# Altium PCB sync.PcbDoc
Units mil, origin at the board's own origin, x right, y up, seen from the top; angles counter-clockwise.
Board outline 4725 x 1750 mil, 2 copper layers (Top Layer, Bottom Layer); 51 components, 35 nets, 217 pads, 12 vias.
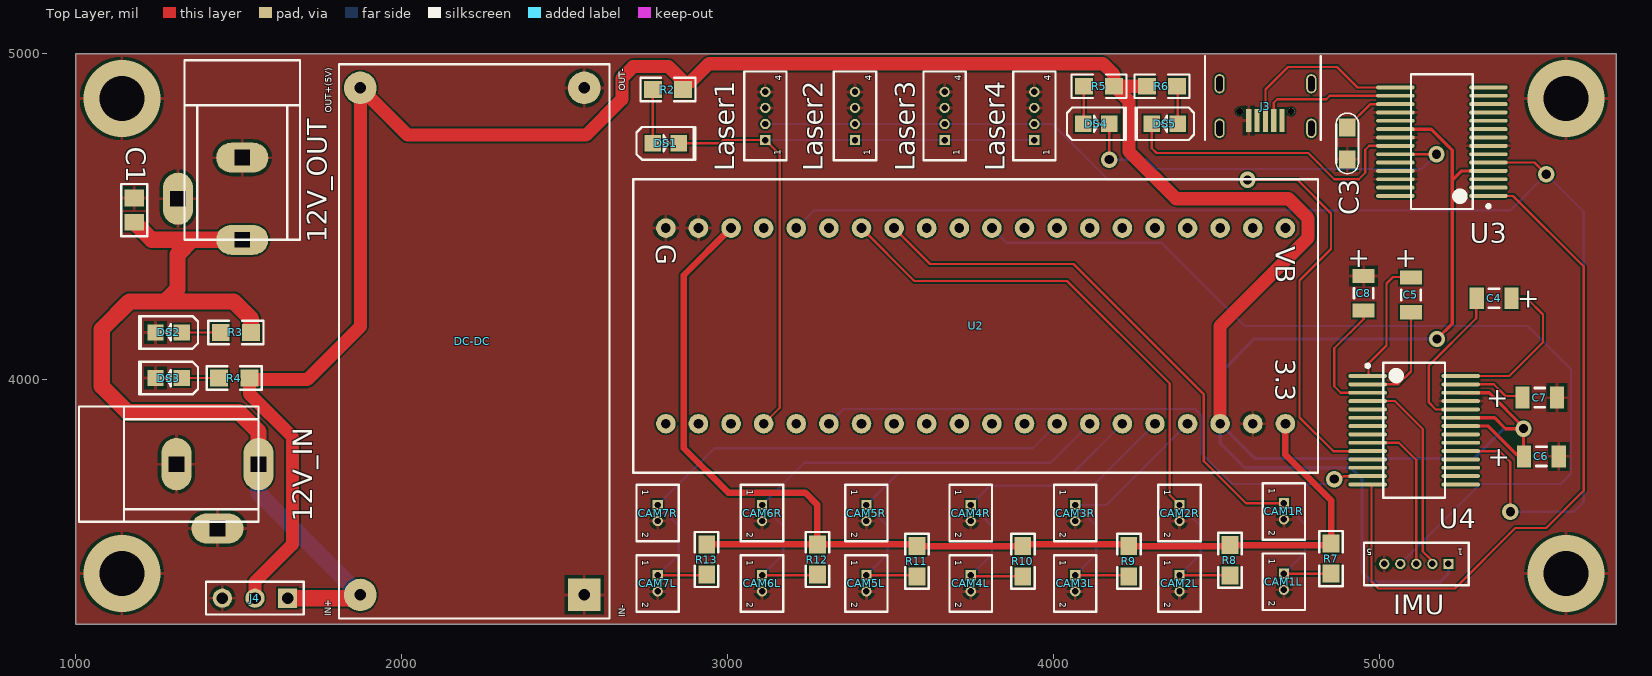
[diagram p0: Top Layer view]
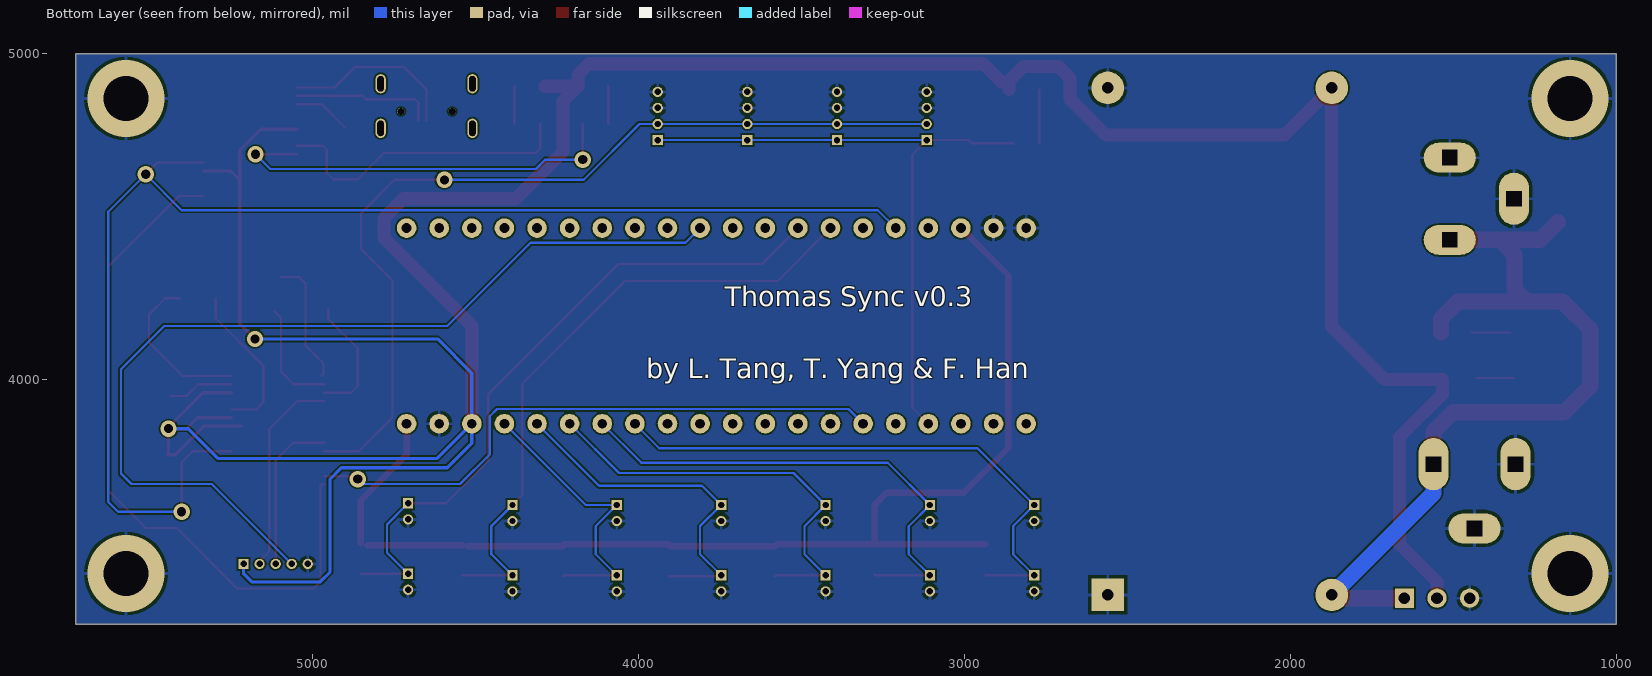
[diagram p1: Bottom Layer view, seen from below]

## Layer stack, top to bottom
Top Solder: solder mask 0.4, Solder Resist, Dk 3.5
Top Layer: signal copper 1.4
Dielectric 1: dielectric 12.6, FR-4, Dk 4.8
Bottom Layer: signal copper 1.4
Bottom Solder: solder mask 0.4, Solder Resist, Dk 3.5

## Board outline
5725,5000 5725,3250 1000,3250 1000,5000

## Design rules (kind name [scope] priority, off if disabled: settings)
Clearance [All] p1: gap=5 ignorepadtopadclearanceinfootprint=FALSE except(0: Arc-Hole Track-Hole SMDPad-Hole THPad-Hole Via-Hole Fill-Hole Poly-Hole Region-Hole Text-Hole)
HoleSize [All] p1: absolutevalues=TRUE maxlimit=150 minlimit=1 maxpercent=80.000 minpercent=20.000
PolygonConnect [All] p1: connectstyle=Relief reliefconductorwidth=10 reliefentries=4 polygonreliefangle="90 Angle" airgapwidth=10
RoomDefinition sync [InComponentClass('sync')] p1: confinementstyle=ConfineIn formatcopy=TRUE lockcomponents=FALSE outline 1000,3250 5725,3250 5725,5000 1000,5000
RoutingLayers RoutingLayers_1 [All] p1: top layer_v5=TRUE bottom layer_v5=TRUE
RoutingVias [All] p1: holewidth=28 width=50 viastyle="Through Hole" minholewidth=28 minwidth=50 maxholewidth=28 maxwidth=50
SolderMaskExpansion [All] p1: expansion=4
Width [All] p1: maxlimit=100 minlimit=7 preferedwidth=20
28 further rules are at their usual default settings.

## Components (designator, comment, footprint, x,y, rotation, side; value= is the part's Value field where it differs from the comment)
12V_IN "CON3" PW_PORT 1415,3745 r90 top
12V_OUT "CON3" PW_PORT 1515,4575 r0 top
C1 "104" 0805 1180,4520 r90 top
C3 "0.1uF" 0805C 4900,4680 r90 top
C4 "0.1uF" C1206 5350,4250 r180 top
C5 "0.1uF" C1206 5095,4260 r270 top
C6 "0.1uF" C1206 5495,3765 r0 top
C7 "0.1uF" C1206 5490,3945 r0 top
C8 "0.1uF" C1206 4950,4265 r270 top
CAM1L "Header 2" 1.25mmP2 4705.4,3405 r270 top
CAM1R "Header 2" 1.25mmP2 4705.4,3620.83 r270 top
CAM2L "Header 2" 1.25mmP2 4385.33,3400 r270 top
CAM2R "Header 2" 1.25mmP2 4385.33,3615.83 r270 top
CAM3L "Header 2" 1.25mmP2 4065.26,3400 r270 top
CAM3R "Header 2" 1.25mmP2 4065.26,3615.83 r270 top
CAM4L "Header 2" 1.25mmP2 3745.2,3400 r270 top
CAM4R "Header 2" 1.25mmP2 3745.2,3615.83 r270 top
CAM5L "Header 2" 1.25mmP2 3425.13,3400 r270 top
CAM5R "Header 2" 1.25mmP2 3425.13,3615.83 r270 top
CAM6L "Header 2" 1.25mmP2 3105.07,3400 r270 top
CAM6R "Header 2" 1.25mmP2 3105.07,3615.83 r270 top
CAM7L "Header 2" 1.25mmP2 2785,3400 r270 top
CAM7R "Header 2" 1.25mmP2 2785,3615.83 r270 top
DC-DC "Header 2X2" DC-DC5V_HDR2*2 2560,3340 r90 top
DS1 "LED2" 0805D 2770,4725 r0 top
DS2 "LED2" 0805D 1325,4145 r180 top
DS3 "LED2" 0805D 1325,4005 r180 top
DS4 "LED2" 0805D 4090,4785 r0 top
DS5 "LED2" 0805D 4380,4785 r180 top
IMU "Header 5" 1.25mmP5 5210,3435 r180 top
J3 "USB Header" USB0.65-5 4700,4795 r270 top
J4 "Header 3" HDR1X3 1650,3330 r180 top
Laser1 "Header 4" 1.25mmP4 3115,4735 r90 top
Laser2 "Header 4" 1.25mmP4 3390,4735 r90 top
Laser3 "Header 4" 1.25mmP4 3665,4735 r90 top
Laser4 "Header 4" 1.25mmP4 3940,4735 r90 top
R2 "1K" 0805R 2770,4890 r0 top
R3 "1K" 0805R 1445,4145 r0 top
R4 "1K" 0805R 1440,4005 r0 top
R5 "1K" 0805R 4185,4900 r180 top
R6 "1K" 0805R 4285,4900 r0 top
R7 "1K" 0805R 4850,3405 r90 top
R8 "1K" 0805R 4540,3400 r90 top
R9 "1K" 0805R 4230,3490 r270 top
R10 "1K" 0805R 3905,3490 r270 top
R11 "1K" 0805R 3580,3490 r270 top
R12 "1K" 0805R 3275,3495 r270 top
R13 "1K" 0805R 2935,3495 r270 top
U2 "MCU" STM32BOARD 3760,4165 r270 top
U3 "FT232R" SSOP-28 5190,4730 r180 top
U4 "MAX3245" SSOP-28 5105,3845 r0 top

## Footprints (in the part's own frame and the unit in brackets; to place one, negate y for a bottom-side part, rotate by r counter-clockwise, add the part's x,y. Pads: shape width x height; smd on the part's side, far side on the other; paste and mask are expansions set on the pad)
1.25mmP2 [mm]
  rect 0.8x0.8 hole 0.5: 1(0,0)
  round 0.8 hole 0.5: 2(1.25,0)
  silkscreen extent -1.58,-1.65 2.82,1.65
1.25mmP4 [mm]
  rect 0.8x0.8 hole 0.5: 1(0,0)
  round 0.8 hole 0.5: 2(1.25,0) 3(2.5,0) 4(3.75,0)
  silkscreen extent -1.58,-1.65 5.33,1.65
1.25mmP5 [mm]
  rect 0.8x0.8 hole 0.5: 1(0,0)
  round 0.8 hole 0.5: 2(1.25,0) 3(2.5,0) 4(3.75,0) 5(5,0)
  silkscreen extent -1.58,-1.65 6.57,1.65
0805 [mm]
  rect 1.3x1.5 smd: 1(-0.95,0) 2(0.95,0)
  silkscreen extent -2.03,-1.02 2.03,1.02
0805C [mm]
  rect 1.4x1.3 smd: 1(-0.102,0) 2(2.388,0)
  silkscreen extent -1.22,-0.88 3.49,0.87
0805D [mil] "二?"
  rect 50x50 smd: 1(0,0) 2(80,0)
  silkscreen extent -50,-50 130,50
0805R [mm]
  rect 1.4x1.3 smd: 1(0,0) 2(2.362,0)
  silkscreen extent -0.97,-0.91 3.33,0.91
C1206 [mm] "Chip Capacitor, Body 3.2x1.6mm, IPC High Density"
  rect 1.1x1.7 smd: 1(-1.35,0) 2(1.35,0)
  silkscreen extent -0.4,-0.75 0.4,0.75, body extent -1.7,-0.9 1.7,0.9, height 1.3
DC-DC5V_HDR2*2 [mm] "Connector; Header; 12x2 Position"
  rect 2.54x2.54 hole 0.9: 1(0,0)
  round 2.54 hole 0.9: 2(0,17.45) 3(39.497,0) 4(39.497,17.45)
  silkscreen extent -1.84,-1.97 41.34,19.11
HDR1X3 [mm] "Connector; Header; 3 Position"
  rect 1.5x1.5 hole 0.9: 1(0,0)
  round 1.5 hole 0.9: 2(2.54,0) 3(5.08,0)
  silkscreen extent -1.27,-1.27 6.35,1.27
PW_PORT [mil]
  oval 160x92 hole 47 square: 1(-4,-146) 3(-4,106)
  oval 92x160 hole 47 square: 2(-201,-20)
  silkscreen extent -181,-146 173,405
SSOP-28 [mm] "SOP, 28-Leads, Body 10.20x5.45mm, Pitch 0.65mm, IPC Medium Density"
  oval 3x0.3 smd: 1(-3.625,4.225) 2(-3.625,3.575) 3(-3.625,2.925) 4(-3.625,2.275) 5(-3.625,1.625) 6(-3.625,0.975) 7(-3.625,0.325) 8(-3.625,-0.325) 9(-3.625,-0.975) 10(-3.625,-1.625) 11(-3.625,-2.275) 12(-3.625,-2.925) 13(-3.625,-3.575) 14(-3.625,-4.225) 15(3.625,-4.225) 16(3.625,-3.575) 17(3.625,-2.925) 18(3.625,-2.275) 19(3.625,-1.625) 20(3.625,-0.975) 21(3.625,-0.325) 22(3.625,0.325) 23(3.625,0.975) 24(3.625,1.625) 25(3.625,2.275) 26(3.625,2.925) 27(3.625,3.575) 28(3.625,4.225)
  silkscreen extent -3.75,-5.25 2.4,5.25, body extent -2.8,-5.25 2.8,5.25, height 2
STM32BOARD [mil] "STM32 board"
  round 60 hole 30: 1(-300,950) 2(-300,850) 3(-300,750) 4(-300,650) 5(-300,550) 6(-300,450) 7(-300,350) 8(-300,250) 9(-300,150) 10(-300,50) 11(-300,-50) 12(-300,-150) 13(-300,-250) 14(-300,-350) 15(-300,-450) 16(-300,-550) 17(-300,-650) 18(-300,-750) 19(-300,-850) 20(-300,-950) 21(300,950) 22(300,850) 23(300,750) 24(300,650) 25(300,550) 26(300,450) 27(300,350) 28(300,250) 29(300,150) 30(300,50) 31(300,-50) 32(300,-150) 33(300,-250) 34(300,-350) 35(300,-450) 36(300,-550) 37(300,-650) 38(300,-750) 39(300,-850) 40(300,-950)
  silkscreen extent -450,-1050 450,1050
USB0.65-5 [mm]
  rect 1.8x0.4 smd: 1(0,0) 2(0,-0.65) 3(0,-1.3) 4(0,-1.95) 5(0,-2.6)
  oval 1.5x0.8 hole 0.5 slot 1.2 at 0 deg: ""(-2.86,2.275) ""(-2.86,-4.875) ""(0.61,2.275) ""(0.61,-4.875)
  round 0.55 hole 0.55: ""(-0.71,0.7) ""(-0.71,-3.3)
  silkscreen extent -5,-6 1.5,3

## Part data
C1 C4 C5 C6 C7 C8: library part "Cap Pol3", "Polarized Capacitor (Surface Mount)"
C3: library part Cap, "Capacitor"
CAM1L CAM1R CAM2L CAM2R CAM3L CAM3R CAM4L CAM4R CAM5L CAM5R CAM6L CAM6R CAM7L CAM7R: "Header, 2-Pin"
DC-DC: "Header, 2-Pin, Dual row"
DS1 DS2 DS3 DS4 DS5: "Typical RED, GREEN, YELLOW, AMBER GaAs LED"
IMU: "Header, 5-Pin"
J3: library part USB
J4: "Header, 3-Pin"
Laser1 Laser2 Laser3 Laser4: "Header, 4-Pin"
R2 R3 R4 R5 R6 R7 R8 R9 R10 R11 R12 R13: library part Res1, "Resistor"

## Via types
v1: diameter 50, hole 28, Top Layer to Bottom Layer, 8 vias
v2: diameter 236.22, hole 137.8, Top Layer to Bottom Layer, 4 vias

## Nets (pads, with @x,y where several pads share a name; then routed paths per layer and width w, separated by ;. In a path a pad name is that pad's centre, name@x,y a point inside that pad or via, vN(x,y) a via of type N, cw(c..) or ccw(c..) an arc to the next point about the centre after c; other vN are vias at no path point)
1PPS: DS1.2 Laser1.1 Laser2.1 Laser3.1 Laser4.1 U2.37 | length 2002.7
  Top Layer w7: DS1.2 2977,4725 2987,4735 Laser1.1 3159,4691 3159,3914 U2.37
  Bottom Layer w7: Laser1.1 Laser2.1 Laser3.1 Laser4.1
GND: 12V_IN.2 12V_IN.3 12V_OUT.2 12V_OUT.3 C1.2 C3.1 C6.2 C7.2 C8.1 CAM1L.2 CAM1R.2 CAM2L.2 CAM2R.2 CAM3L.2 CAM3R.2 CAM4L.2 CAM4R.2 CAM5L.2 CAM5R.2 CAM6L.2 CAM6R.2 CAM7L.2 CAM7R.2 DC-DC.1 DC-DC.3 DS2.2 DS3.2 IMU.5 J3.5 J4.3 Laser1.3 Laser1.4 Laser2.3 Laser2.4 Laser3.3 Laser3.4 Laser4.3 Laser4.4 U2.19 U2.20 U2.22 U3.7 U3.18 U3.21 U3.25 U3.26 U4.25
  other v2: 1141.73,3405.51 5570.87,3405.51 1141.73,4862.2 5570.87,4862.2
GPS_MSG: Laser1.2 Laser2.2 Laser3.2 Laser4.2 U4.10 | length 2766.4
  Top Layer w7: v1(4594,4613) 4747,4613 4850,4510 4850,4401 4753,4304 4753,3884.47 4856.44,3781.02 U4.10
  Bottom Layer w7: Laser1.2 Laser2.2 Laser3.2 Laser4.2 3995.79,4784.21 4167,4613 v1(4594,4613)
GPS_TX: U2.35 U4.13 | length 1844.8
  Top Layer w7: v1(4860,3695) 4880,3695 4889.25,3704.25 U4.13
  Bottom Layer w7: U2.35 3355,3910 4433,3910 4455,3888 4455,3771 4546,3680 4845,3680 v1(4860,3695)
IMU_RX: U3.1 U4.14 | length 2162.4
  Top Layer w7: U4.14 4974,3678.66 4974,3381 4995,3360 5230,3360 5415,3545 5510,3545 5625,3660 5625,4347 5408.34,4563.66 U3.1
IMU_RX_232: IMU.3 U4.9 | length 489.7
  Top Layer w7: U4.9 5058.39,3806.61 5111.57,3753.43 IMU.3
IMU_SYNCOUT: IMU.4 U2.10 | length 2913.7
  Bottom Layer w7: U2.10 3855,4420 4330,4420 4585,4165 5453,4165 5586,4032 5586,3712 5554,3680 5307.36,3680 IMU.4
IMU_TX: U2.16 U3.5 U4.19 | length 4184
  Top Layer w7: U4.19 5366,3781.02 5400,3747.02 v1(5400,3595) ; U3.5 5473.98,4666.02 v1(5510,4630)
  Bottom Layer w7: U2.16 3265,4520 5400,4520 v1(5510,4630) ; v1@5395,3595 5595,3595 5625,3625 5625,4515 v1(5510,4630) ; v1@5520,4630 v1(5510,4630)
IMU_TX_232: IMU.2 U4.4 | length 630.5
  Top Layer w7: U4.4 5045.43,3934.57 5131.5,3848.5 5131.5,3473.2 5160.79,3443.91 IMU.2
NetC3_2: C3.2 U3.17 | length 176.8
  Top Layer w7: C3.2 4971.16,4845.16 U3.17
NetC4_1: C4.1 U4.28 | length 495.9
  Top Layer w7: U4.28 5396.34,4011.34 5500,4115 5500,4200 5450,4250 C4.1@5405,4250
NetC4_2: C4.2 U4.24 | length 486.5
  Top Layer w7: U4.24 5171.02,3908.98 5150,3930 5150,4043.64 5295,4188.64 C4.2@5295,4250
NetC5_1: C5.1 U4.1 | length 392.2
  Top Layer w7: U4.1@4971,4011.34 4965,4017.34 4965,4050 5020,4105 5020,4295 5040,4315 C5.1@5095,4315
NetC5_2: C5.2 U4.2 | length 342.3
  Top Layer w7: U4.2 5055.75,3985.75 5095,4025 5095,4190 C5.2@5115,4210
NetC7_1: C7.1 U4.27 | length 202.1
  Top Layer w7: U4.27 5349.25,3985.75 5385,3950 C7.1@5435,3950
NetC8_2: C8.2 U4.3 | length 382.8
  Top Layer w7: C8.2@4950,4215 4950,4186.26 4860,4096.26 4860,3980 4879.84,3960.16 U4.3
NetDS1_1: DS1.1 R2.1 | length 165
  Top Layer w7: DS1.1 R2.1
NetDS2_1: DS2.1 R3.1 | length 120
  Top Layer w7: DS2.1 R3.1
NetDS3_1: DS3.1 R4.1 | length 115
  Top Layer w7: DS3.1@1315,4005 R4.1@1430,4005
NetDS4_1: DS4.1 R5.2 | length 115.8
  Top Layer w7: DS4.1 4092,4787 R5.2
NetDS4_2: DS4.2 U3.23 | length 1270
  Top Layer w7: v1(4170,4675) DS4.2 ; U3.23 v1(5173.39,4691.61)
  Bottom Layer w7: v1(4170,4675) 4285,4675 4313.5,4646.5 5128.27,4646.5 v1(5173.39,4691.61)
NetDS5_1: DS5.1 R6.2 | length 115.8
  Top Layer w7: R6.2 4380,4898 DS5.1
NetDS5_2: DS5.2 U3.22 | length 945
  Top Layer w7: DS5.2 4300,4710 4315,4695 4780,4695 4860,4615 4935,4615 4955,4635 4955,4705 4967.2,4717.2 U3.22
NetJ3_2: J3.2 U3.16 | length 436.1
  Top Layer w7: J3.2 4674.41,4849.41 4685,4860 4835,4860 4845.75,4870.75 U3.16
NetJ3_3: J3.3 U3.15 | length 547.9
  Top Layer w7: J3.3 4648.82,4889.82 4718,4959 4868.34,4959 4931,4896.34 U3.15
SYNCIN1: CAM1L.1 CAM1R.1 R7.1 U2.13 | length 2079.1
  Top Layer w7: U2.13 3620,4355 4060,4355 4460,3955 4460,3750 4589.17,3620.83 CAM1R.1 ; CAM1L.1 R7.1
  Bottom Layer w7: CAM1L.1 4770,3469.6 4770,3556.22 CAM1R.1
SYNCIN2: CAM2L.1 CAM2R.1 R8.1 U2.14 | length 1951.4
  Top Layer w7: U2.14 3572,4303 4040,4303 4355,3988 4355,3646.16 CAM2R.1 ; CAM2L.1 R8.1
  Bottom Layer w7: CAM2L.1 4450,3464.67 4450,3551.16 CAM2R.1
SYNCIN3: CAM3L.1 CAM3R.1 R9.2 U2.24 | length 883.4
  Top Layer w7: CAM3L.1 4227,3400 R9.2
  Bottom Layer w7: CAM3L.1 4130,3464.74 4130,3551.09 CAM3R.1 4160.83,3615.83 U2.24
SYNCIN4: CAM4L.1 CAM4R.1 R10.2 U2.25 | length 1104.6
  Top Layer w7: CAM4L.1 3742.2,3397 R10.2
  Bottom Layer w7: CAM4L.1 3810,3464.8 3810,3551.03 CAM4R.1 3804.37,3675 4120,3675 U2.25
SYNCIN5: CAM5L.1 CAM5R.1 R11.2 U2.26 | length 1313.8
  Top Layer w7: CAM5L.1 3577,3400 R11.2
  Bottom Layer w7: CAM5L.1 3490,3464.87 3490,3550.96 CAM5R.1 3523.3,3714 4059,3714 U2.26
SYNCIN6: CAM6L.1 CAM6R.1 R12.2 U2.27 | length 1548.5
  Top Layer w7: CAM6L.1 3273,3400 R12.2
  Bottom Layer w7: CAM6L.1 3170,3464.93 3170,3550.89 CAM6R.1 3234.24,3745 3990,3745 U2.27
SYNCIN7: CAM7L.1 CAM7R.1 R13.2 U2.28 | length 1748.7
  Top Layer w7: CAM7L.1 2933,3400 R13.2
  Bottom Layer w7: CAM7L.1 2850,3465 2850,3550.83 CAM7R.1 2959.17,3790 3935,3790 U2.28
VDD_3V3: R7.2 R8.2 R9.1 R10.1 R11.1 R12.1 R13.1 U2.18 U2.21 | length 3645.5
  Top Layer w20: R13.1 R12.1 ; U2.18 2865,4320 2865,3790 3002,3653 3238,3653 3275,3616 R12.1 ; R10.1 R11.1 3575,3495 R12.1 ; R10.1@3905,3495 R9.1@4230,3495 ; R9.1 R8.2@4524.41,3490 ; R8.2 R7.2@4830.94,3493 ; U2.21 4710,3770 4850,3630 R7.2
VDD_5V: C6.1 DC-DC.4 IMU.1 J4.2 R2.2 R4.2 R5.1 R6.1 U2.23 U3.4 U3.20 U4.22 U4.23 U4.26 | length 10931.4
  Top Layer w10: U3.20 5156.61,4768.39 5221.58,4703.42 5221.58,4611.58 ; v1(5175,4125) 5221.58,4171.58 5221.58,4611.58 ; U4.22@5215.54,3857.8 5332.2,3857.8 5420,3770 C6.1@5440,3770 ; U4.23 5351.61,3883.39 5385,3850 v1(5440,3850) ; U4.26 5334.84,3960.16 5440,3855 v1(5440,3850) ; 5249.57,4640.43 5250.43,4640.43 ; U3.4 5250.43,4640.43 ; C6.1@5445,3770 C6.1@5440,3770 ; 5221.58,4611.58 5250.43,4640.43 ; C6.1@5440,3770 v1(5440,3850)
  Top Layer w40: J4.2 1550,3380 1665,3495 1665,3825 1533,3957 1533,4000 1710,4000 1872.99,4162.99 DC-DC.4 2017.99,4750 2565,4750 2675,4860 2675,4925 2710,4960 2818.51,4960 2863,4915.51 R2.2 ; R2.2@2886.5,4913.5 2942,4969 4151,4969 4185,4935 R5.1 ; R6.1 R5.1 ; U2.23 4510,4165 4780,4435 4780,4495 4720,4555 4375,4555 4230,4700 4230,4855 R5.1
  Bottom Layer w10: v1(5175,4125) 4615,4125 4510,4020 U2.23 ; IMU.1 5210,3405 5185,3380 4975,3380 4945,3410 4945,3695 4910,3730 4585,3730 4510,3805 U2.23 ; v1(5440,3850) 5380,3850 5288.51,3758.51 4616.49,3758.51 U2.23
VDD_12V_IN: 12V_IN.1 12V_OUT.1 C1.1 DC-DC.2 J4.1 R3.2 | length 2703.8
  Top Layer w50: C1.1 1233.6,4429 1357.4,4429 ; 12V_OUT.1 1357.4,4429 ; R3.2 1538,4187 1485,4240 1275,4240 ; 12V_IN.1 1561,3840 1501,3900 1160,3900 1080,3980 1080,4155 1165,4240 1275,4240 ; J4.1 1862.99,3330 DC-DC.2 ; 1275,4240 1312.4,4277.4 1312.4,4384 1357.4,4429
  Bottom Layer w50: 12V_IN.1 1561,3651.99 DC-DC.2
pads on no net: J3. J3.1 J3.4 U2.1 U2.2 U2.3 U2.4 U2.5 U2.6 U2.7 U2.8 U2.9 U2.11 U2.12 U2.15 U2.17 U2.29 U2.30 U2.31 U2.32 U2.33 U2.34 U2.36 U2.38 U2.39 U2.40 U3.2 U3.3 U3.6 U3.8 U3.9 U3.10 U3.11 U3.12 U3.13 U3.14 U3.19 U3.24 U3.27 U3.28 U4.5 U4.6 U4.7 U4.8 U4.11 U4.12 U4.15 U4.16 U4.17 U4.18 U4.20 U4.21

## Polygon pours and split planes (outlines as drawn)
GND on Bottom Layer "Bottom Layer-No Net" (solid, pour order 5): 1000,5000 1000,3250 5725,3250 5725,5000
GND on Top Layer "Bottom Layer-No Net" (solid, pour order 3): 1000,5000 1000,3250 5725,3250 5725,5000

## Silkscreen, mask and mechanical layers (free items; w line width, h text height)
Top Overlay:
  text "+" at 4970,4345 h60
  text "+" at 5115,4345 h60
  text "+" at 5490,4220 h60
  text "+" at 5395,3915 h60
  text "+" at 5400,3735 h60
Bottom Overlay:
  text "Thomas Sync v0.3" at 3735,4225 h60
  text "by L. Tang, T. Yang & F. Han" at 3975,4005 h60

## Text inside footprints (layer, text, board x,y; h text height)
CAM1L: Top Overlay "2" at 4658.4,3322 h20 r270; Top Overlay "1" at 4658.4,3451 h20 r270
CAM1R: Top Overlay "2" at 4658.4,3537.83 h20 r270; Top Overlay "1" at 4658.4,3666.83 h20 r270
CAM2L: Top Overlay "2" at 4338.33,3317 h20 r270; Top Overlay "1" at 4338.33,3446 h20 r270
CAM2R: Top Overlay "2" at 4338.33,3532.83 h20 r270; Top Overlay "1" at 4338.33,3661.83 h20 r270
CAM3L: Top Overlay "2" at 4018.26,3317 h20 r270; Top Overlay "1" at 4018.26,3446 h20 r270
CAM3R: Top Overlay "2" at 4018.26,3532.83 h20 r270; Top Overlay "1" at 4018.26,3661.83 h20 r270
CAM4L: Top Overlay "2" at 3698.2,3317 h20 r270; Top Overlay "1" at 3698.2,3446 h20 r270
CAM4R: Top Overlay "2" at 3698.2,3532.83 h20 r270; Top Overlay "1" at 3698.2,3661.83 h20 r270
CAM5L: Top Overlay "2" at 3378.13,3317 h20 r270; Top Overlay "1" at 3378.13,3446 h20 r270
CAM5R: Top Overlay "2" at 3378.13,3532.83 h20 r270; Top Overlay "1" at 3378.13,3661.83 h20 r270
CAM6L: Top Overlay "2" at 3058.07,3317 h20 r270; Top Overlay "1" at 3058.07,3446 h20 r270
CAM6R: Top Overlay "2" at 3058.07,3532.83 h20 r270; Top Overlay "1" at 3058.07,3661.83 h20 r270
CAM7L: Top Overlay "2" at 2738,3317 h20 r270; Top Overlay "1" at 2738,3446 h20 r270
CAM7R: Top Overlay "2" at 2738,3532.83 h20 r270; Top Overlay "1" at 2738,3661.83 h20 r270
DC-DC: Top Overlay "OUT+(5V)" at 1786,4819 h20 r90; Top Overlay "OUT-" at 2685,4886 h20 r90; Top Overlay "IN-" at 2686,3271 h20 r90; Top Overlay "IN+" at 1784,3274 h20 r90
IMU: Top Overlay "1" at 5256,3482 h20 r180; Top Overlay "5" at 4976,3482 h20 r180
J3: Mechanical 1 "PCB EDGE" at 4503.15,4972.17 h9.84
Laser1: Top Overlay "1" at 3162,4689 h20 r90; Top Overlay "4" at 3166,4917 h20 r90
Laser2: Top Overlay "1" at 3437,4689 h20 r90; Top Overlay "4" at 3441,4917 h20 r90
Laser3: Top Overlay "1" at 3712,4689 h20 r90; Top Overlay "4" at 3716,4917 h20 r90
Laser4: Top Overlay "1" at 3987,4689 h20 r90; Top Overlay "4" at 3991,4917 h20 r90
U2: Top Overlay "3.3" at 4680,4065 h60 r270; Top Overlay "G" at 2780,4415 h60 r270; Top Overlay "VB" at 4680,4410 h60 r270